# Altium PCB somiqboard.PcbDoc (part 9 of 10)
Units mm, origin at the board's own origin, x right, y up, seen from the top; angles counter-clockwise.
Board outline 110 x 96 mm, 4 copper layers (Top Layer, Ground_Plane, Power_Plane, Bottom Layer), stack 1.454 mm thick; 221 components, 356 nets, 1185 pads, 539 vias.
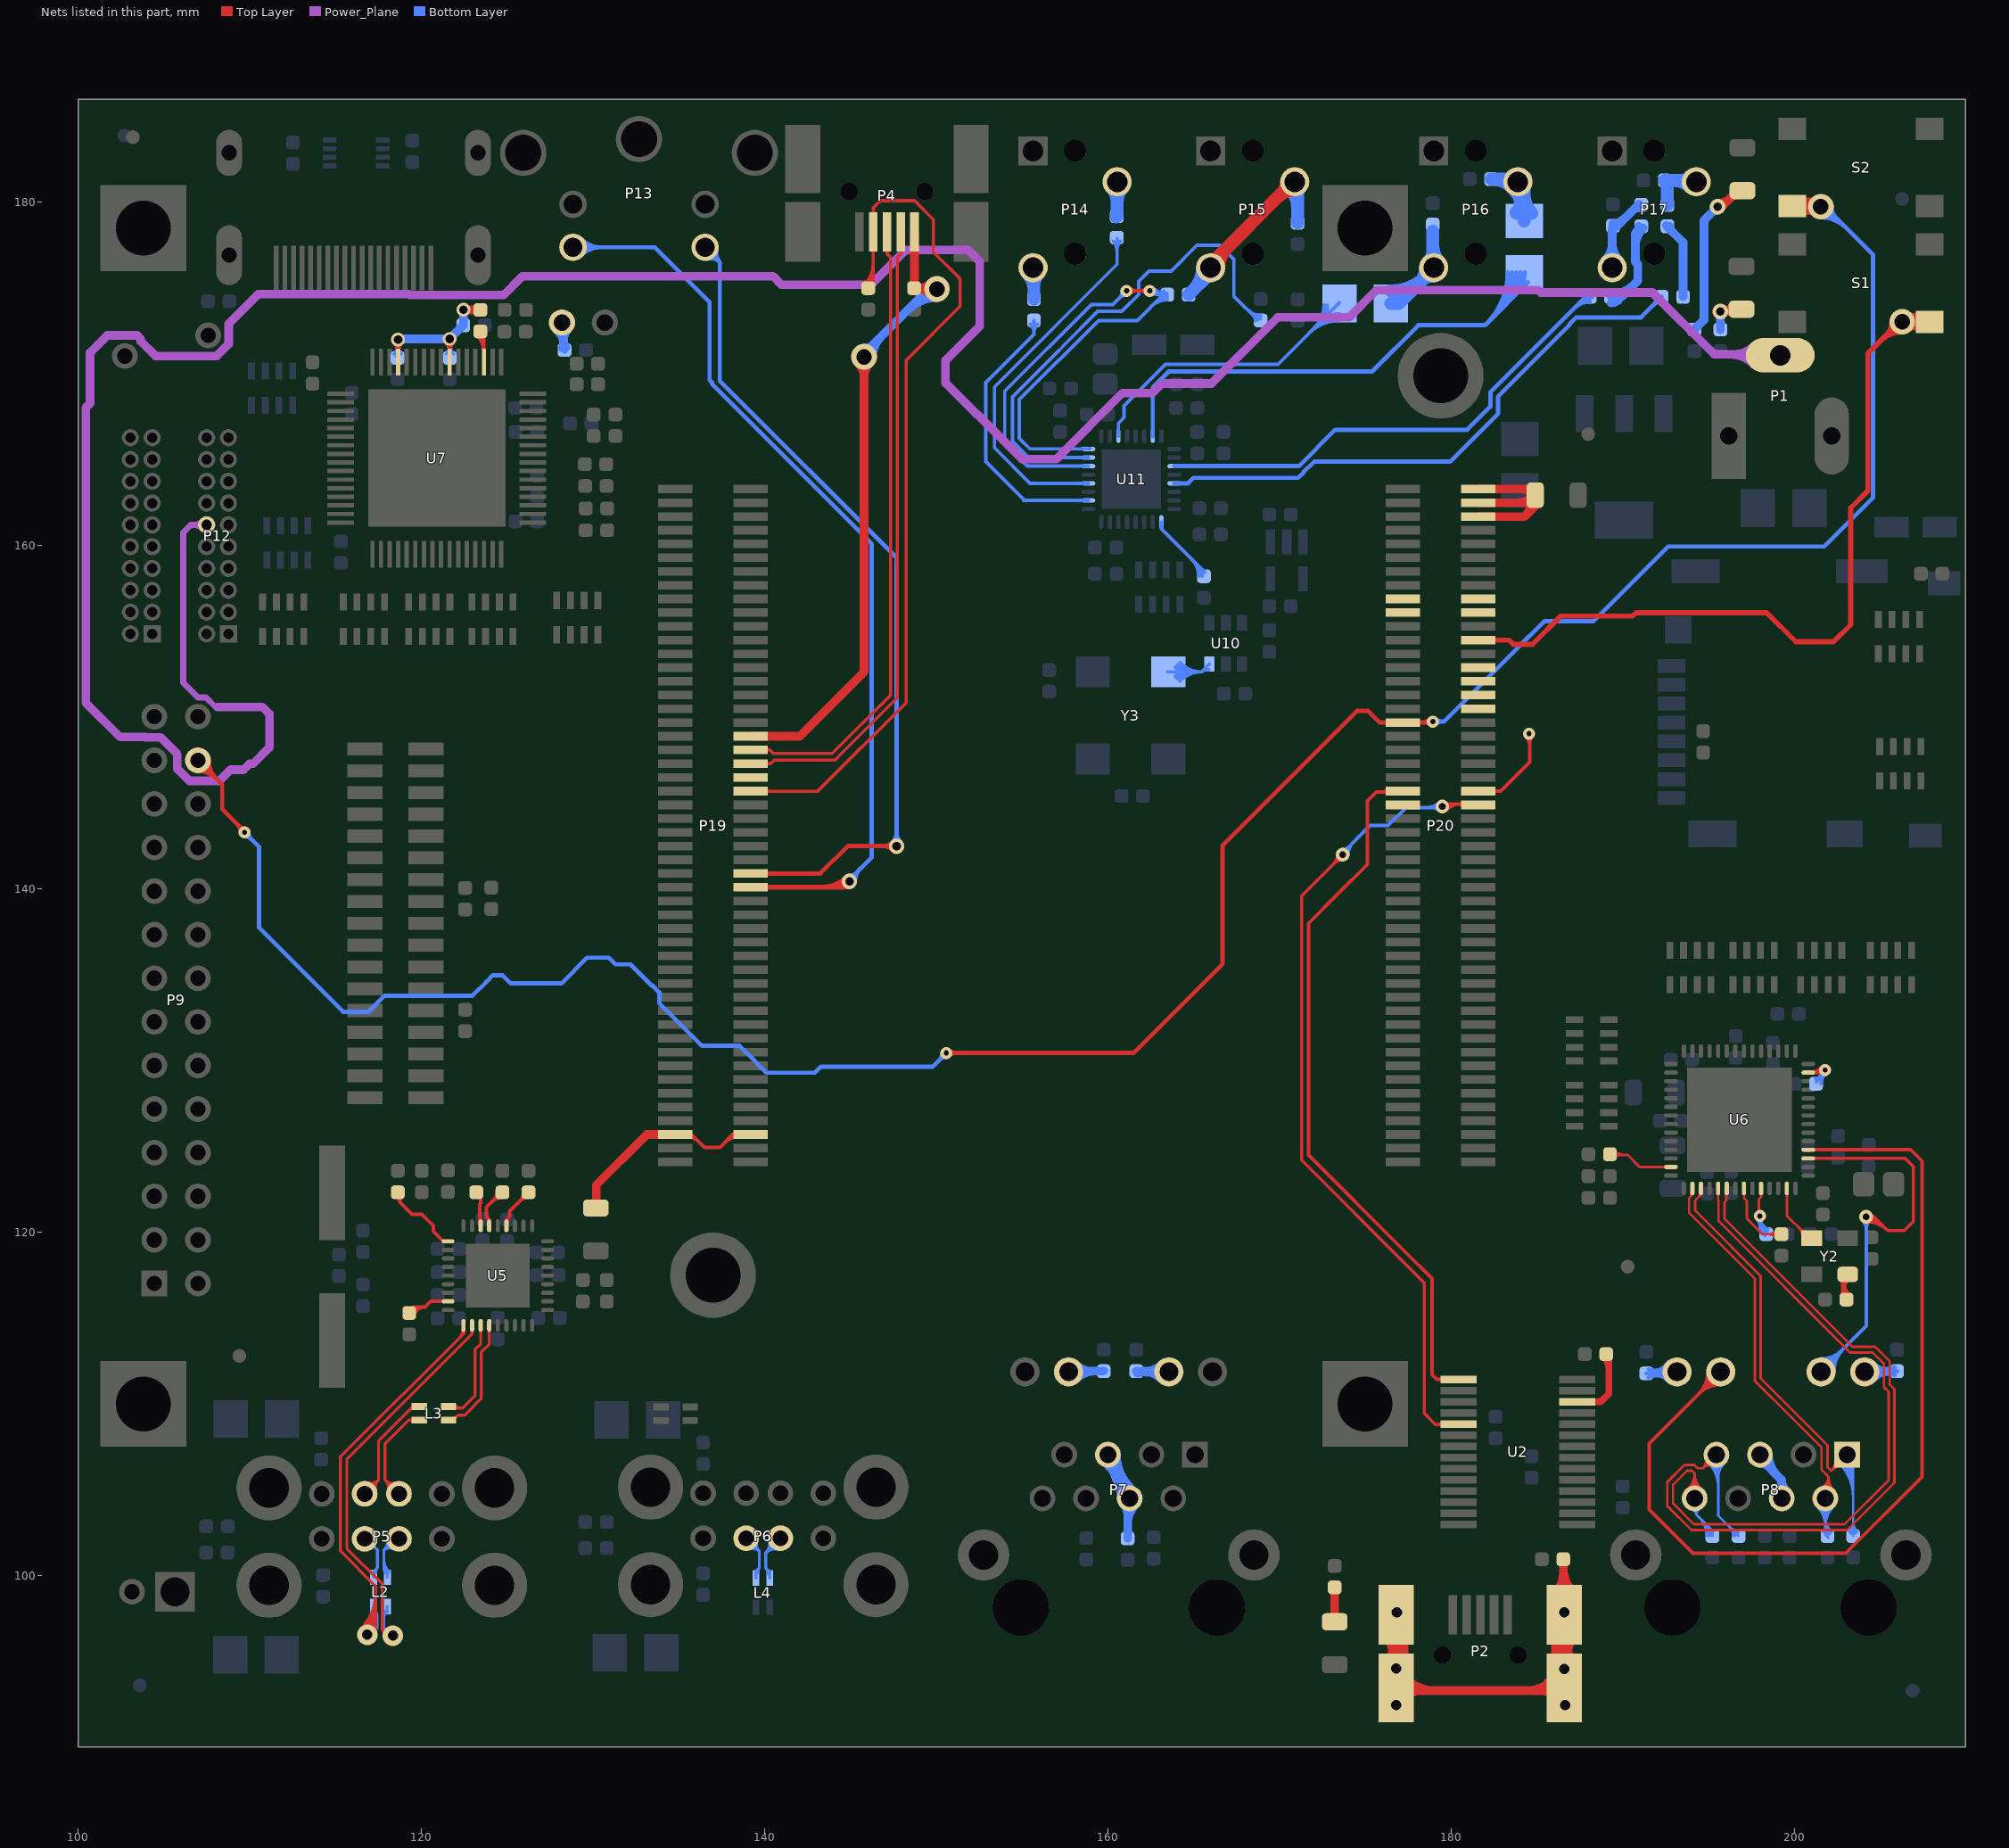
[diagram p11: the nets of this part, all layers, seen from the top]

## Via types
v1: diameter 0.7/0.7/0.7/0.7 (per signal layer), hole 0.3, Top Layer to Bottom Layer, tented both sides, 270 vias
v2: diameter 0.8, hole 0.3, Top Layer to Bottom Layer, tented both sides, 49 vias
v3: diameter 0.6/0.7/0.7/0.6 (per signal layer), hole 0.3, Top Layer to Bottom Layer, tented both sides, 47 vias
v4: diameter 0.6, hole 0.3, Top Layer to Bottom Layer, tented both sides, 43 vias
v5: diameter 1.1/1.1/1.1/1.1 (per signal layer), hole 0.6, Top Layer to Bottom Layer, tented both sides, 32 vias
v6: diameter 0.8/0.8/0.8/0.8 (per signal layer), hole 0.4, Top Layer to Bottom Layer, tented both sides, 31 vias
v7: diameter 0.9/0.9/0.9/0.9 (per signal layer), hole 0.5, Top Layer to Bottom Layer, tented both sides, 29 vias
v8: diameter 1.5/1.5/1.5/1.5 (per signal layer), hole 0.9, Top Layer to Bottom Layer, tented both sides, 14 vias
v9: diameter 1.2/1.2/1.2/1.2 (per signal layer), hole 0.6, Top Layer to Bottom Layer, tented both sides, 10 vias
v10: diameter 0.8/0.8/0.8/0.8 (per signal layer), hole 0.5, Top Layer to Bottom Layer, tented both sides, 6 vias
v11: diameter 1/1/1/1 (per signal layer), hole 0.5, Top Layer to Bottom Layer, tented both sides, 3 vias
v12: diameter 0.8/0.8/0.8/0.8 (per signal layer), hole 0.8, Top Layer to Bottom Layer, tented both sides, 2 vias
v13: diameter 1.2/1.2/1.2/1.2 (per signal layer), hole 1.2, Top Layer to Bottom Layer, tented both sides, 2 vias
v14: diameter 0.6/0.6/0.6/0.6 (per signal layer), hole 0.3, Top Layer to Bottom Layer, tented both sides, 1 vias

## Nets (pads, with @x,y where several pads share a name; then routed paths per layer and width w, separated by ;. In a path a pad name is that pad's centre, name@x,y a point inside that pad or via, vN(x,y) a via of type N, cw(c..) or ccw(c..) an arc to the next point about the centre after c; other vN are vias at no path point) (continued)
NetC64_1: C64.1 P14.3 | length 3.5
  Bottom Layer w0.75: P14.3@155.315,175.864 cw(c154.382,174.931) 155.702,174.931 ; P14.3@155.7,176.1 155.702,176.098 C64.1@155.702,174.371 ; 155.702,175.176 cw(c156.675,175.176) P14.3@155.987,175.864
NetC64_2: C64.2 U11.10 | length 17.5
  Bottom Layer w0.2: 155.1,162.65 155.115,162.635 U11.10@158.877,162.635 ; 155.15,162.65 152.9,164.9 152.9,169.5 155.702,172.302 C64.2@155.702,173.121 ; C64.2@155.49,172.909 cw(c154.978,172.397) 155.702,172.397 cw(c156.426,172.397) C64.2@155.914,172.909
NetC65_1: C65.1 P15.2 P15.3 R44.1 | length 17.5
  Top Layer w0.75: P15.3@165.75,176.15 165.9,176.3 P15.2@170.825,181.225 ; P15.3@166.475,176.2 cw(c168.105,176.2) 166.952,177.352 ; 169.918,180.318 cw(c170.9,179.337) P15.2@170.9,180.725 ; 170.16,180.56 ccw(c169.52,181.2) P15.2@170.425,181.2
  Bottom Layer w0.75: C65.1@164.719,174.625 165.95,175.856 P15.3@165.95,176.25 ; C65.1@164.981,174.887 ccw(c163.669,176.2) P15.3@165.525,176.2 ; P15.2@170.564,180.864 cw(c169.345,179.645) 171.069,179.645 ; R44.1@171.069,178.816 171.069,181.069 P15.2@171.1,181.1
NetC65_2: C65.2 U11.14 U11.16 | length 45.9
  Top Layer w0.2: v1(161.1,174.85) v1(162.45,174.85) ; v1@161.277,174.673 cw(c161.704,174.246) 161.704,174.85 cw(c161.704,175.454) v1@161.277,175.027 ; v1@162.273,174.673 ccw(c161.846,174.246) 161.846,174.85 ccw(c161.846,175.454) v1@162.273,175.027
  Bottom Layer w0.2: U11.14@158.877,164.635 155.315,164.635 154,165.95 154,169 159.05,174.05 160.3,174.05 v1(161.1,174.85) ; U11.16@158.95,165.65 158.94,165.64 155.46,165.64 154.85,166.25 154.85,168.51 157.19,170.85 157.2,170.85 159.471,173.121 161.721,173.121 C65.2@163.25,174.65 ; v1@160.85,174.85 cw(c160.246,174.85) 160.673,174.423 cw(c161.1,173.996) v1@161.1,174.6 ; v1(162.45,174.85) 162.6,174.7 C65.2@163.45,174.7 ; v1@162.485,174.885 ccw(c162.933,175.333) 162.933,174.7 ; v1@162.494,174.874 ccw(c162.891,175.09) 162.774,174.653 ; 162.54,173.94 cw(c163.469,173.012) C65.2@163.469,174.325 ; v1@162.575,174.633 cw(c162.696,174.424) 162.758,174.658 ; v1@162.6,174.7 cw(c162.6,173.806) C65.2@163.251,174.419 ; v1@162.627,175.027 ccw(c163.416,175.816) C65.2@163.416,174.7 ; 162.882,174.282 cw(c163.469,173.695) C65.2@163.469,174.525 ; 162.926,174.7 ccw(c162.926,175.168) C65.2@163.257,174.837 ; 163.063,174.7 cw(c163.063,174.243) C65.2@163.396,174.556
NetC66_1: C66.1 P14.2 | length 3.9
  Bottom Layer w0.75: P14.2@160.215,180.864 cw(c159.404,180.053) 160.551,180.053 cw(c161.698,180.053) P14.2@160.887,180.864 ; C66.1@160.5,179.15 160.551,179.201 P14.2@160.551,181.2
NetC66_2: C66.2 U11.12 | length 22.6
  Bottom Layer w0.2: U11.12@158.877,163.635 155.465,163.635 153.4,165.7 153.4,169.25 160.55,176.4 C66.2@160.55,177.9 ; C66.2@160.316,177.735 cw(c159.751,177.17) 160.55,177.17 ; 160.55,177.276 cw(c161.199,177.276) C66.2@160.74,177.735
NetC69_1: C69.1 U11.19 | length 24.2
  Bottom Layer w0.2: U11.19@160.627,166.385 160.627,167.14 160.95,167.463 160.95,168.151 163.374,170.575 169.925,170.575 C69.1@173.5,174.15 ; 171.732,172.382 cw(c173.506,170.609) C69.1@173.506,173.117 ; 172.068,172.718 ccw(c170.769,174.017) C69.1@172.606,174.017 ; 172.074,172.724 cw(c173.506,171.291) C69.1@173.506,173.317 ; 172.409,173.059 ccw(c171.452,174.017) C69.1@172.806,174.017 ; 172.415,173.065 cw(c173.506,171.974) C69.1@173.506,173.517
NetC69_2: C69.2 P16.3 R53.2 | length 11.7
  Bottom Layer w0.75: C69.2@176.506,174.117 176.967,174.117 179.05,176.2 P16.3@179.35,176.2 ; C69.2@176.506,174.842 ccw(c176.506,177.705) P16.3@178.531,175.681 ; 178.154,175.304 ccw(c177.258,176.2) P16.3@178.525,176.2 ; 178.274,175.424 cw(c179,174.699) P16.3@179,175.725 ; P16.3@178.664,176.536 ccw(c177.974,177.226) 178.95,177.226 ; 178.95,177.467 ccw(c180.267,177.467) P16.3@179.336,176.536 ; R53.2@178.95,178.335 178.95,176.7 P16.3@179.3,176.35
NetC72_1: C72.1 U11.23 | length 39.3
  Bottom Layer w0.25: U11.23@162.627,166.385 162.627,169.227 163.55,170.15 175.4,170.15 178.1,172.85 182,172.85 C72.1@184.5,175.35 ; 182.053,172.903 ccw(c179.036,175.919) C72.1@183.302,175.919 ; 182.479,173.329 ccw(c179.89,175.919) C72.1@183.552,175.919 ; 182.906,173.756 ccw(c180.743,175.919) C72.1@183.802,175.919 ; 183.333,174.183 ccw(c181.597,175.919) C72.1@184.052,175.919 ; 183.76,174.61 ccw(c182.45,175.919) C72.1@184.302,175.919
NetC72_2: C72.2 P16.2 R51.2 | length 11.5
  Bottom Layer w0.75: R51.2@182.352,181.356 184.256,181.356 P16.2@184.35,181.45 ; R51.2@182.377,181.356 cw(c182.377,179.677) 183.564,180.864 cw(c181.843,179.143) C72.2@184.277,179.143 ; C72.2@183.79,179.41 ccw(c183.381,179.93) 184.02,180.101 ; C72.2@183.835,179.361 ccw(c182.768,180.428) 184.277,180.428 ccw(c185.786,180.428) C72.2@184.719,179.361 ; 184.032,180.056 ccw(c184.98,180.31) C72.2@184.489,179.46 ; C72.2@184.277,178.919 184.277,181.177 P16.2@184.3,181.2
NetC73_1: C73.1 R49.2 | length 9.3
  Bottom Layer w0.5: R49.2@189.337,174.148 ccw(c189.337,174.778) 189.783,174.333 ; R49.2@189.337,174.498 189.948,174.498 190.9,175.45 190.9,176.394 190.75,176.544 190.75,178.2 C73.1@191.05,178.5 ; R49.2@189.337,174.648 ccw(c189.337,176.485) 190.636,175.186 ; 190.75,177.419 cw(c192.283,177.419) C73.1@191.199,178.503 ; 190.75,178.075 cw(c191.135,178.075) C73.1@191.105,178.459 ; C73.1@190.79,178.24 ccw(c190.422,178.609) C73.1@190.943,178.609
NetC73_2: C73.2 P17.3 R54.2 | length 8.5
  Bottom Layer w0.5: P17.3@188.976,176.624 ccw(c187.951,177.649) 189.4,177.649 ccw(c190.849,177.649) P17.3@189.824,176.624 ; P17.3@189.4,176.2 189.4,178.45 R54.2@189.5,178.55 ; 189.4,178.165 cw(c189.906,178.165) R54.2@189.548,178.523 ; R54.2@189.442,178.629 189.679,178.629 C73.2@190.95,179.9 ; R54.2@189.442,178.779 ccw(c189.442,179.713) 190.103,179.053 ; 190.523,179.473 cw(c191.093,178.903) C73.2@191.093,179.709
NetC76_1: C76.1 R50.2 | length 4.9
  Bottom Layer w0.5: C76.1@192.55,178.65 193.528,177.672 R50.2@193.528,174.498 ; C76.1@192.767,178.609 ccw(c193.192,178.609) C76.1@192.891,178.309
NetC76_2: C76.2 P17.2 R52.2 | length 5.8
  Bottom Layer w0.75: R52.2@192.45,181.25 192.617,181.083 C76.2@192.617,179.859 ; R52.2@192.452,181.258 cw(c192.055,180.861) 192.617,180.861 ; R52.2@192.47,181.276 194.574,181.276 P17.2@194.55,181.252 ; 192.97,181.276 cw(c192.97,179.87) P17.2@193.964,180.864 ; 193.337,181.276 ccw(c193.337,182.163) P17.2@193.964,181.536
NetD1_1: D1.1 R1.1 | length 11.9
  Top Layer w0.5: v7(195.55,179.75) 195.8,179.75 D1.1@196.75,180.7 ; v7@195.55,179.95 ccw(c195.55,181.036) D1.1@196.318,180.268 ; 196.306,180.256 cw(c196.736,179.825) D1.1@196.736,180.434 ; D1.1@196.311,180.261 ccw(c195.888,180.684) D1.1@196.486,180.684
  Bottom Layer w0.5: R1.1@194.183,172.593 194.75,173.16 194.75,178.95 v7(195.55,179.75) ; v7@195.35,179.75 cw(c194.867,179.75) 195.209,179.409 cw(c195.55,179.067) v7@195.55,179.55
NetD2_1: D2.1 R2.1 | length 5.2
  Top Layer w0.25: D2.1@196.69,173.64 196.7,173.65 D2.1@196.9,173.85
  Top Layer w0.5: v7(195.7,173.65) 196.7,173.65 D2.1@196.75,173.65 ; v7@195.779,173.65 ccw(c195.779,174.682) D2.1@196.509,173.952 ; v7@195.8,173.823 ccw(c196.076,174.302) D2.1@196.22,173.768 ; v7@195.841,173.509 cw(c196.183,173.167) 196.183,173.65 cw(c196.183,174.133) v7@195.841,173.791
  Bottom Layer w0.5: v7@195.559,173.509 cw(c195.2,173.15) 195.707,173.15 ; v7(195.7,173.65) 195.707,173.643 R2.1@195.707,172.593 ; 195.707,173.184 cw(c196.166,173.184) v7@195.841,173.509
NetD3_1: D3.1 R3.1 | length 3
  Top Layer w0.5: D3.1@173.051,97.484 ccw(c172.624,97.911) 173.228,97.911 ccw(c173.832,97.911) D3.1@173.405,97.484 ; R3.1@173.2,99.35 173.228,99.322 R3.1@173.228,99.314 D3.1@173.228,97.307
NetL1_1: L1.1 P2.6 P2.7 | length 107.5
  Top Layer w0.5: P2.7@176.268,94.988 ccw(c173.807,97.449) P2.7@177.287,97.449 ; P2.7@176.268,96.442 cw(c173.807,93.982) P2.7@177.287,93.982 ; P2.7@176.409,96.187 cw(c174.668,95.287) P2.7@176.531,94.678 ; 176.585,95.52 ccw(c177.383,95.043) P2.7@176.66,94.458 ; P2.7@176.588,92.662 ccw(c176.076,93.174) 176.8,93.174 ccw(c177.524,93.174) 177.012,92.662 cw(c177.404,93.054) P2.7@176.85,93.054 ; P2.7@176.596,92.67 ccw(c176.061,93.25) P2.7@176.85,93.25 ; P2.7@176.604,94.372 cw(c176.092,93.86) 176.816,93.86 cw(c177.54,93.86) P2.7@177.028,94.372 ; P2.7@176.604,94.796 ccw(c174.954,96.446) P2.7@177.287,96.446 ; P2.7@176.621,94.635 ccw(c175.014,96.242) P2.7@177.287,96.242 ; P2.7@176.621,96.796 cw(c175.014,95.189) P2.7@177.287,95.189 ; P2.7@176.638,97.638 cw(c175.071,96.071) P2.7@177.287,96.071 ; P2.7@176.662,94.326 cw(c176.01,93.229) P2.7@177.287,93.229 ; P2.7@176.742,97.57 cw(c176.511,96.972) P2.7@177.134,96.82 ; P2.7@176.773,98.14 ccw(c176.595,98.809) P2.7@177.287,98.809 ; v5(176.8,92.45) 176.8,93.2 P2.7@176.85,93.25 ; P2.7@176.816,93.465 v5(176.816,94.584) ; P2.7@176.85,92.35 P2.7@176.85,92.826 ; v5(176.85,97.85) 176.85,98.372 P2.7@177.287,98.809 ; P2.7@176.918,94.756 cw(c176.532,94.107) P2.7@177.287,94.107 ; P2.7@176.922,98.037 cw(c176.718,97.508) P2.7@177.269,97.373 ; P2.7@176.944,94.738 cw(c176.342,94.018) P2.7@177.277,94.101 ; P2.7@176.953,96.135 ccw(c177.977,95.523) P2.7@177.049,94.773 ; P2.7@176.957,94.443 ccw(c176.161,95.239) P2.7@177.287,95.239 ; P2.7@176.957,95.126 cw(c176.261,94.766) P2.7@177.006,94.522 ; P2.7@176.991,97.991 cw(c176.278,97.278) P2.7@177.287,97.278 ; P2.7@177.01,93.66 ccw(c177.879,94.529) 177.879,93.3 ; P2.7@177.09,92.528 cw(c177.825,92.724) P2.7@177.287,93.263 ; P2.7@177.094,94.697 cw(c178.004,95.066) 177.154,95.557 ; P2.7@177.126,97.968 cw(c177.826,98.27) P2.7@177.287,98.809 ; P2.7@177.287,93.309 P2.7@177.287,93.263 ; P2.7@177.364,92.917 cw(c178.287,91.994) 178.287,93.3 ; P2.7@177.364,94.013 ccw(c179.086,95.736) 179.086,93.3 ; 184.345,93.3 ccw(c184.345,95.736) P2.6@186.068,94.013 ; 185.144,93.3 cw(c185.144,91.994) P2.6@186.068,92.917 ; 185.553,93.3 ccw(c185.553,94.529) P2.6@186.421,93.66 ; P2.6@185.657,93.776 ccw(c184.956,94.991) P2.6@186.31,94.628 ; P2.6@185.969,93.956 ccw(c185.637,94.531) P2.6@186.3,94.544 ; P2.6@186.068,98.988 ccw(c184.904,100.153) 186.55,100.153 ; P2.6@186.1,93.204 cw(c187.333,93.204) P2.6@186.743,94.286 ; P2.6@186.1,93.874 cw(c189.732,93.874) P2.6@187.164,96.442 ; P2.6@186.1,94.045 cw(c186.875,94.045) P2.6@186.504,94.726 ; P2.6@186.1,95.081 cw(c188.525,95.081) P2.6@186.81,96.796 ; P2.6@186.1,95.274 ccw(c187.324,95.274) P2.6@186.459,94.409 ; 186.1,95.919 cw(c188.531,95.919) P2.6@186.812,97.638 ; P2.6@186.1,96.35 ccw(c188.525,96.35) P2.6@186.81,94.635 ; P2.6@186.1,96.481 ccw(c188.531,96.481) P2.6@186.812,94.762 ; P2.6@186.1,97.126 cw(c187.324,97.126) P2.6@186.459,97.991 ; P2.6@186.1,97.557 ccw(c189.732,97.557) P2.6@187.164,94.988 ; P2.6@186.1,98.187 ccw(c186.64,98.187) P2.6@186.577,97.651 ; P2.6@186.115,94.029 cw(c187.109,93.935) P2.6@186.473,94.704 ; P2.6@186.148,97.363 cw(c186.695,97.499) P2.6@186.548,98.043 ; P2.6@186.187,93.309 186.178,93.3 186.65,93.3 v5(186.65,92.45) ; P2.6@186.2,98.85 P2.6@186.187,98.837 ; 186.247,95.61 cw(c185.292,95.058) P2.6@186.32,94.659 ; P2.6@186.272,96.867 cw(c186.829,97.006) P2.6@186.679,97.56 ; P2.6@186.328,97.976 ccw(c185.693,98.268) P2.6@186.187,98.763 ; P2.6@186.371,94.744 ccw(c185.496,95.488) P2.6@186.479,96.083 ; P2.6@186.388,94.338 cw(c185.838,93.788) P2.6@186.616,93.788 ; P2.6@186.388,98.062 ccw(c185.996,98.454) P2.6@186.55,98.454 ; P2.6@186.411,94.483 cw(c187.167,94.751) P2.6@186.455,95.119 ; P2.6@186.438,92.662 ccw(c185.926,93.174) 186.65,93.174 ccw(c187.374,93.174) P2.6@186.862,92.662 ; P2.6@186.55,98.695 ccw(c187.445,98.695) P2.6@186.812,98.062 ; 186.55,100.47 ccw(c188.646,100.47) P2.6@187.164,98.988 ; L1.1@186.55,100.95 P2.6@186.55,98.4 ; v5(186.6,94.55) 186.6,94.6 186.616,94.616 P2.6@186.616,93.465 ; v5(186.6,97.85) P2.6@186.6,97.9 ; P2.6@186.616,93.864 cw(c187.286,93.864) P2.6@186.812,94.338 ; P2.6@186.635,98.148 cw(c186.706,98.75) P2.6@186.1,98.75 ; P2.6@186.752,94.421 ccw(c186.054,95.014) 186.838,95.488 ; P2.6@186.883,94.65 cw(c188.657,95.279) P2.6@186.985,96.144 ; P2.7@176.85,92.826 P2.7@176.85,93.25 ; P2.7@176.85,92.826 P2.7@177.287,93.263 ; P2.7@177.287,98.809 177.287,93.313 177.3,93.3 186.1,93.3 P2.6@186.1,98.75 ; P2.6@186.1,98.75 P2.6@186.187,98.837 ; P2.6@186.187,98.763 P2.6@186.187,98.837 ; P2.6@186.187,98.763 P2.6@186.55,98.4 ; P2.6@186.55,98.4 ccw(c186.857,98.4) 186.727,98.122 cw(c186.857,98.4) P2.6@186.55,98.4 ; P2.6@186.55,98.4 cw(c186.12,98.4) 186.403,98.076 ccw(c186.12,98.4) P2.6@186.55,98.4 ; P2.6@186.55,98.4 186.55,97.95 P2.6@186.6,97.9 ; P2.6@186.55,98.4 186.6,98.35 P2.6@186.6,97.9
NetP7_4: P7.4 P7.5 R19.2 | length 15.3
  Bottom Layer w0.5: P7.5@160,107 P7.5@160,106.45 ; P7.5@160.01,107.04 ccw(c161.446,107.035) 160.431,106.019 ; P7.5@160.479,106.866 ccw(c162.093,106.268) 160.602,105.407 ; P7.5@160.51,107.038 ccw(c163.139,107.029) P7.4@161.28,105.17 ; P7.4@160.78,104.51 ccw(c158.116,104.565) P7.5@160,106.45 ; 160.829,105.621 cw(c159.74,104.532) P7.4@161.28,104.5 P7.4@161.28,105.17 ; P7.4@160.926,104.146 cw(c160.355,103.575) 161.163,103.575 ; R19.2@161.163,102.164 P7.4@161.163,104.463 ; 161.163,103.01 cw(c162.77,103.01) P7.4@161.634,104.146 ; P7.5@160,106.45 P7.4@161.28,105.17
NetP7_10: P7.10 R17.2 | length 4.6
  Bottom Layer w0.5: R17.2@161.671,111.907 163.407,111.907 P7.10@163.45,111.95 ; R17.2@161.746,111.777 cw(c162.087,111.187) 162.263,111.845 ; R17.2@162.032,111.907 cw(c162.032,110.332) P7.10@163.146,111.446 ; 162.211,111.907 ccw(c162.211,113.229) P7.10@163.146,112.294
NetP7_11: P7.11 R18.2 | length 4.6
  Bottom Layer w0.5: P7.11@157.5,111.85 157.557,111.907 R18.2@159.766,111.907 ; P7.11@158.144,111.446 cw(c159.258,110.332) 159.258,111.907 ; P7.11@158.144,112.294 ccw(c159.079,113.229) 159.079,111.907
NetP8_4: P8.4 P8.5 | length 6.2
  Bottom Layer w0.5: P8.5@198.01,106.54 cw(c198.01,105.816) 198.522,106.328 ; P8.5@198.1,106.75 199.28,105.57 ; P8.5@198.51,107.04 ccw(c200.2,107.04) 199.005,105.845 ; P8.4@198.959,104.884 ccw(c198.385,105.57) 199.28,105.57 ; P8.4@199.28,104.5 199.28,105.57 ; P8.4@199.601,104.884 cw(c200.175,105.57) 199.28,105.57
NetP8_9: P8.9 R29.2 | length 9.4
  Bottom Layer w0.25: P8.9@204.3,111.95 204.343,111.907 R29.2@205.994,111.907 ; P8.9@204.446,111.534 cw(c205.346,110.634) 205.346,111.907 ; P8.9@204.446,112.206 ccw(c205.167,112.927) 205.167,111.907 ; P8.9@204.623,111.357 cw(c205.95,110.03) R29.2@205.95,111.907 ; P8.9@204.623,112.383 ccw(c205.771,113.531) R29.2@205.771,111.907 ; 205.203,112.059 ccw(c205.426,112.891) R29.2@205.857,112.145 ; 205.323,111.739 cw(c205.505,111.06) R29.2@205.856,111.669 ; 205.377,111.753 ccw(c205.215,112.357) R29.2@205.756,112.045 ; 205.472,111.987 cw(c205.352,111.536) R29.2@205.756,111.77 ; R29.2@205.8,111.713 ccw(c205.33,111.243) 205.33,111.907 ccw(c205.33,112.571) R29.2@205.8,112.101
NetP8_12: P8.12 R30.2 | length 9.1
  Bottom Layer w0.25: R30.2@191.527,111.542 cw(c191.972,110.769) 192.203,111.631 ; R30.2@191.526,112.018 ccw(c191.858,112.593) 192.03,111.952 ccw(c192.202,111.311) R30.2@191.627,111.643 ; R30.2@191.583,111.586 cw(c192.053,111.116) 192.053,111.78 cw(c192.053,112.444) R30.2@191.583,111.974 ; R30.2@191.627,111.918 ccw(c192.005,112.135) 191.892,111.714 ; R30.2@191.647,111.78 cw(c191.647,110.337) P8.12@192.667,111.357 ; 191.938,111.78 ccw(c191.938,112.952) P8.12@192.822,112.182 ; 192.251,111.78 cw(c192.251,110.941) P8.12@192.844,111.534 ; P8.12@192.633,112.346 cw(c191.389,113.43) R30.2@191.389,111.78 193.13,111.78 P8.12@193.11,111.8
NetP19_95: P19.95 P19.96 R56.1 | length 15.5
  Top Layer w0.21: P19.96@134.75,125.7 P19.96@134.8,125.7 135.75,125.7 136.5,124.95 137.4,124.95 138.15,125.7 ; P19.96@135.55,125.555 cw(c135.55,124.722) 136.139,125.311 ; 137.69,125.24 cw(c138.45,124.481) P19.95@138.45,125.555 ; 138.049,125.599 cw(c138.45,125.198) P19.95@138.45,125.765 ; P19.95@138.336,125.61 ccw(c138.15,125.462) 138.15,125.7 ; P19.95@138.336,125.79 cw(c138.15,125.938) 138.15,125.7 ; P19.95@139.2,125.7 138.15,125.7
  Top Layer w0.5: R56.1@129.998,121.589 ccw(c129.511,122.076) 130.2,122.076 ; R56.1@130.2,121.45 130.2,122.75 133.15,125.7 P19.96@134.75,125.7 ; 130.2,121.955 ccw(c130.718,121.955) R56.1@130.352,121.589
NetP20_1: P20.1 P20.3 P20.5 R57.1 | length 13.5
  Top Layer w0.5: P20.5@181.6,161.7 184.3,161.7 ; P20.3@181.6,162.5 184.6,162.5 R57.1@184.85,162.75 ; P20.1@181.6,163.3 184.6,163.3 R57.1@184.8,163.1 ; 183.847,162.5 ccw(c183.847,163.756) R57.1@184.735,162.868 ; 184.045,163.3 cw(c184.045,162.324) R57.1@184.735,163.014 ; R57.1@184.663,162.673 cw(c183.417,162.583) 184.3,161.7 ; R57.1@184.9,162.8 184.9,162.3 184.3,161.7
NetR4_2: R4.2 U2.26 | length 5.1
  Top Layer w0.4: U2.26@187.35,110.125 188.725,110.125 189.2,110.6 R4.2@189.2,112.9 ; R4.2@188.909,112.759 cw(c188.205,112.055) 189.2,112.055
NetR6_1: R6.1 U5.28 | length 5.2
  Top Layer w0.2: R6.1@118.533,122.046 cw(c118.423,121.738) 118.75,121.738 ; R6.1@118.6,122.3 118.75,122.15 118.75,121.75 119.45,121.05 120.031,121.05 120.7,120.381 120.7,120.05 121.275,119.475 U5.28@121.56,119.475 ; 118.75,121.887 cw(c119.075,121.887) R6.1@118.845,122.117
NetR8_1: R8.1 U5.22 | length 3.8
  Top Layer w0.2: U5.22@124.95,120.4 124.95,120.716 125.15,120.916 125.15,121.226 R8.1@126.253,122.329 ; U5.22@124.985,120.625 cw(c125.289,120.625) 125.074,120.84 ; R8.1@125.953,122.329 cw(c125.229,122.329) 125.741,121.817 cw(c126.253,121.305) R8.1@126.253,122.029
NetR9_1: R9.1 U5.24 | length 3.7
  Top Layer w0.2: 123.846,120.84 cw(c123.631,120.625) U5.24@123.935,120.625 ; U5.24@123.96,120.375 123.96,120.726 123.8,120.886 123.8,121.469 124.631,122.3 R9.1@124.65,122.3 ; 124.099,121.768 cw(c124.729,121.138) R9.1@124.729,122.029 ; 124.266,121.935 ccw(c123.872,122.329) R9.1@124.429,122.329
NetR10_1: R10.1 U5.25 | length 2.5
  Top Layer w0.2: R10.1@123.15,122.45 123.46,122.14 123.46,121.695 123.4,121.635 123.4,120.435 U5.25@123.46,120.375 ; 123.4,120.831 ccw(c123.666,120.831) U5.25@123.478,120.643
NetR11_1: R11.1 U5.35 | length 4.7
  Top Layer w0.2: R11.1@119.206,115.333 cw(c119.654,115.175) 119.654,115.65 ; R11.1@119.25,115.3 119.6,115.65 120.219,115.65 ; R11.1@119.394,115.267 cw(c119.936,115.075) 119.936,115.65 ; R11.1@119.583,115.2 cw(c120.219,114.975) 120.219,115.65 ; U5.35@121.56,115.975 120.544,115.975 120.219,115.65
NetR14_1: R14.1 U6.52 | length 8.7
  Top Layer w0.15: v1(198,120.95) 197.949,121 197.949,121.935 198.074,122.06 U6.52@198.074,122.555
  Bottom Layer w0.15: v1@197.808,120.752 cw(c197.371,120.3) 198,120.3 ; v1@197.87,120.707 cw(c197.68,120.349) 198.071,120.454 cw(c198.324,120.522) v1@198.166,120.731 ; v1@197.953,120.679 cw(c197.919,120.483) 198.111,120.534 cw(c198.303,120.586) v1@198.176,120.738 ; 198,120.267 ccw(c198.537,120.267) R14.1@198.325,119.773 ; 198,120.494 ccw(c198.635,120.494) R14.1@198.384,119.911 ; v1@198,120.722 ccw(c198.732,120.722) R14.1@198.443,120.049 ; R14.1@198.068,119.997 ccw(c197.794,120.095) 198,120.3 ; v1@198.191,120.752 ccw(c198.629,120.3) 198,120.3 ; R14.1@198.3,120 198,120.3 ; R14.1@198.31,120.207 cw(c198.242,120.543) 198,120.3 ; R14.1@198.502,120.187 cw(c198.83,120.95) v1(198,120.95) 198,120.3
NetR16_2: R16.2 U6.13 | length 6.4
  Top Layer w0.2: U6.13@200.824,129.305 v1@201.655,129.305 ; U6.13@200.846,129.305 ccw(c200.846,130.404) v1@201.623,129.627 ; 201.329,129.305 ccw(c201.329,129.921) v1@201.765,129.485
  Bottom Layer w0.2: R16.2@201.275,128.951 ccw(c201.275,129.497) 201.661,129.111 ; v1@201.551,129.43 cw(c200.688,129.362) 201.3,128.75 v1@201.8,129.25 ; 201.561,129.053 ccw(c201.367,129.389) v1@201.75,129.443 ; R16.2@201.575,128.666 cw(c202.346,128.704) v1@201.8,129.25 ; v1@201.604,129.295 cw(c201.365,129.106) R16.2@201.629,128.954 ; 201.607,129.057 ccw(c201.256,129.407) v1@201.75,129.446 ; 201.706,129.086 cw(c201.933,128.955) v1@201.865,129.209 ; v1(201.8,129.45) v1@201.8,129.25
NetR20_1: R20.1 U6.50 | length 6.1
  Top Layer w0.15: U6.50@197.074,122.555 197.074,122.01 197.25,121.834 197.25,120.8 198.162,119.888 199.212,119.888 R20.1@199.25,119.85 ; R20.1@199.033,119.658 ccw(c198.478,119.103) 198.478,119.888 ccw(c198.478,120.673) R20.1@199.033,120.118 ; R20.1@199.139,119.764 ccw(c198.841,119.466) 198.841,119.888 ccw(c198.841,120.31) R20.1@199.139,120.012
NetR22_1: R22.1 U6.41 | length 5.6
  Top Layer w0.15: R22.1@189.2,124.5 190.3,124.5 190.995,123.805 U6.41@192.824,123.805 ; R22.1@189.391,124.67 ccw(c189.801,125.08) 189.801,124.5 ; R22.1@189.497,124.316 cw(c189.941,123.872) 189.941,124.5 ; R22.1@189.497,124.776 ccw(c190.163,125.442) 190.163,124.5
NetR28_2: R28.2 Y2.1 | length 6.2
  Top Layer w0.2: Y2.1@202.728,117.303 cw(c202.507,117.082) 202.819,117.082 ; R28.2@202.819,116.328 cw(c204.197,116.328) Y2.1@203.222,117.303 ; 202.819,116.811 cw(c203.714,116.811) Y2.1@203.081,117.444 ; 202.819,116.884 ccw(c203.859,116.884) R28.2@203.124,116.149 ; Y2.1@202.819,117.367 ccw(c204.342,117.367) R28.2@203.265,116.29 ; Y2.1@202.819,117.475 202.819,116.331 R28.2@203,116.15 ; 202.934,116.937 cw(c203.159,116.997) Y2.1@203.086,117.218
  Top Layer w0.25: Y2.1@202.672,117.475 202.672,117.722 Y2.1@202.75,117.8
NetR46_2: R46.2 U11.15 | length 30.5
  Bottom Layer w0.2: U11.15@158.877,165.135 155.399,165.135 154.45,166.084 154.45,168.676 157.024,171.25 157.034,171.25 157.4,171.616 157.4,171.626 159.424,173.65 160.819,173.65 161.8,174.631 161.8,175.4 162.4,176 163.7,176 165.2,177.5 166.55,177.5 167.35,176.7 167.35,174.55 R46.2@168.75,173.15 ; 168.174,173.726 ccw(c168.91,174.462) R46.2@168.91,173.421 ; 168.491,173.409 cw(c168.202,173.121) R46.2@168.61,173.121 ; 168.516,173.384 ccw(c168.91,173.779) R46.2@168.91,173.221
NetR47_2: R47.2 U11.1 | length 6.1
  Bottom Layer w0.2: U11.1@163.127,161.385 163.127,160.973 R47.2@165.65,158.45 ; U11.1@163.152,161.11 ccw(c163.543,161.11) 163.266,160.834 ; 164.905,159.195 cw(c163.932,158.222) R47.2@165.308,158.222 ; 165.246,158.854 cw(c164.615,158.222) R47.2@165.508,158.222
NetR49_1: R49.1 U11.27 | length 30.4
  Bottom Layer w0.25: U11.27@163.877,164.635 163.89,164.649 165.644,164.649 165.645,164.65 166.206,164.65 166.207,164.649 167.041,164.649 167.042,164.65 167.557,164.65 167.572,164.635 171.135,164.635 173.25,166.75 180.95,166.75 182.3,168.1 182.3,168.95 187.8,174.45 R49.1@188.2,174.45 ; 187.21,173.86 cw(c188.087,172.982) R49.1@188.087,174.223 ; 187.636,174.286 cw(c188.087,173.836) R49.1@188.087,174.473
NetR50_1: R50.1 U11.29 | length 34.6
  Bottom Layer w0.25: U11.29@163.877,163.635 164.685,163.635 165,163.95 171.1,163.95 171.4,164.25 ; 171.418,164.282 172.036,164.9 179.95,164.9 182.75,167.7 182.75,168.7 186.938,172.888 186.938,172.938 187.3,173.3 191.08,173.3 R50.1@192.25,174.47 ; R50.1@192.003,174.498 cw(c191.339,174.498) 191.809,174.029 cw(c192.278,173.559) R50.1@192.278,174.223 ; R50.1@192.25,174.5 R50.1@192.25,174.47 ; R50.1@192.278,174.498 R50.1@192.25,174.47
NetR58_2: R58.2 SW1.1 | length 5.2
  Bottom Layer w0.4: SW1.1@127.822,172.584 cw(c126.743,171.393) R58.2@128.35,171.393 ; R58.2@128.177,171.5 ccw(c127.764,171.738) 128.224,171.862 ; SW1.1@128.2,173 128.35,172.85 R58.2@128.35,171.4 ; R58.2@128.209,171.541 ccw(c127.867,171.883) 128.35,171.883 ccw(c128.833,171.883) R58.2@128.491,171.541 ; 128.222,171.87 ccw(c128.694,171.997) R58.2@128.45,171.573 ; 128.35,172.005 cw(c129.195,172.005) SW1.1@128.597,172.603
NetU6_55: U6.55 Y2.3 | length 5.8
  Top Layer w0.15: U6.55@199.574,122.555 199.574,120.976 200.55,120 200.6,120 Y2.3@200.95,119.65 ; 200.217,120.333 cw(c199.534,119.65) Y2.3@200.5,119.65 ; 200.278,120.272 ccw(c200.875,120.87) Y2.3@200.875,120.025 ; Y2.3@200.473,120.077 cw(c200.046,119.65) Y2.3@200.65,119.65 ; Y2.3@200.534,120.016 ccw(c200.875,120.358) Y2.3@200.875,119.875
NetU10_3: U10.3 Y3.3 | length 9.4
  Bottom Layer w0.2: Y3.3@163.5,152.65 165.473,152.65 ; Y3.3@163.922,152.38 cw(c164.547,151.792) 164.547,152.65 ; Y3.3@163.924,152.926 ccw(c164.557,153.512) 164.557,152.65 ; Y3.3@164.068,152.243 cw(c165.01,151.356) 165.01,152.65 ; Y3.3@164.071,153.062 ccw(c165.015,153.937) 165.015,152.65 ; Y3.3@164.214,152.106 cw(c165.473,150.921) 165.473,152.65 ; Y3.3@164.218,153.198 ccw(c165.473,154.362) 165.473,152.65 ; U10.3@165.879,152.761 ccw(c165.773,152.35) 165.473,152.65 ; U10.3@165.928,153.105 165.473,152.65
NLINK_ACT: P8.11 U6.4 | length 58.5
  Top Layer w0.2: P8.11@194.97,111.87 cw(c193.159,111.87) 194.44,110.59 cw(c195.72,109.309) P8.11@195.72,111.12 ; P8.11@195.17,111.87 cw(c193.842,111.87) 194.781,110.931 cw(c195.72,109.992) P8.11@195.72,111.32 ; P8.11@195.5,111.65 191.55,107.7 191.55,103.85 194.1,101.3 203,101.3 207.45,105.75 207.45,124.15 206.795,124.805 U6.4@200.824,124.805
NRESET: P9.26 P20.36 S2.3 | length 164.5
  Top Layer w0.25: P9.26@106.985,146.873 cw(c106.985,145.364) 108.052,146.431 cw(c109.119,147.498) P9.26@107.61,147.498 ; P9.26@106.985,147.123 cw(c106.985,146.218) 107.625,146.858 cw(c108.265,147.498) P9.26@107.36,147.498 ; P9.26@106.985,147.498 108.4,146.083 108.4,144.65 v1@109.7,143.35 ; P9.26@107.05,147.345 P9.26@107.05,147.35 ; 109.281,143.769 cw(c108.811,143.3) v1@109.475,143.3 ; 109.401,143.649 ccw(c109.7,143.947) v1@109.7,143.525 ; v1@109.675,143.325 v1(109.7,143.3) ; v1(150.6,130.45) 161.518,130.45 166.7,135.632 166.7,135.65 ; v1@150.759,130.291 cw(c151.143,129.907) 151.143,130.45 cw(c151.143,130.993) v1@150.759,130.609 ; 166.695,135.651 166.695,142.541 174.529,150.375 175.171,150.375 175.846,149.7 P20.36@177.2,149.7 178.9,149.7 v1(178.95,149.75) ; P20.36@176.362,149.612 ccw(c176.148,149.398) 176.148,149.7 ccw(c176.148,150.002) P20.36@176.362,149.788 ; P20.36@178.038,149.612 cw(c178.252,149.398) 178.252,149.7 cw(c178.252,150.002) P20.36@178.038,149.788 ; 178.286,149.7 ccw(c178.286,150.414) v1@178.791,149.909 ; 178.528,149.7 cw(c178.528,149.328) v1@178.791,149.591
  Top Layer w1: S2.3@199.898,179.777 201.523,179.777 v8(201.55,179.75) ; v8@201.55,179.75 201.75,179.75 v8(201.55,179.75)
  Bottom Layer w0.25: v1@109.7,143.075 cw(c109.7,142.532) 110.084,142.916 cw(c110.468,143.3) v1@109.925,143.3 ; v1(109.7,143.3) 110.55,142.45 110.55,137.75 115.463,132.837 116.913,132.837 117.855,133.78 122.98,133.78 123.775,134.575 123.775,134.58 124.17,134.975 124.73,134.975 125.205,134.5 128.168,134.5 129.662,135.995 130.919,135.995 131.309,135.605 132.189,135.605 133.419,134.375 133.48,134.375 133.875,133.98 133.875,133.339 136.354,130.86 138.548,130.86 138.895,130.513 138.895,130.511 140.111,129.295 142.939,129.295 143.294,129.65 145.318,129.65 145.323,129.645 149.795,129.645 v1(150.6,130.45) ; v1@150.375,130.45 cw(c149.832,130.45) 150.216,130.066 cw(c150.6,129.682) v1@150.6,130.225 ; v1(178.95,149.75) 179.6,149.75 184.121,154.271 184.121,154.275 185.175,155.329 185.179,155.329 185.45,155.6 188.3,155.6 192.65,159.95 201.75,159.95 204.6,162.8 204.6,176.95 v8@201.65,179.9 ; v1@179.109,149.591 cw(c179.493,149.207) 179.493,149.75 cw(c179.493,150.293) v1@179.109,149.909 ; v8@201.55,179.125 cw(c201.55,177.013) 203.044,178.506 ; v8@201.55,179.375 cw(c201.55,177.866) 202.617,178.933 ; v8@202.175,179.75 ccw(c203.08,179.75) 202.44,179.11
NSPD100: P8.10 U6.3 | length 33.3
  Top Layer w0.2: U6.3@200.824,124.305 206.47,124.305 206.95,123.825 206.95,120.625 206.425,120.1 205.45,120.1 ; v6@204.198,121 cw(c204.215,120.191) 204.787,120.763 ; v6@204.2,120.8 v6(204.2,120.9) 204.65,120.9 ; v6@204.202,120.8 cw(c204.228,119.542) 205.118,120.432 ; v6@204.206,120.6 cw(c204.242,118.892) 205.45,120.1 ; v6@204.477,120.785 cw(c204.65,120.713) 204.65,120.9 ; v6@204.477,121.015 ccw(c204.65,121.087) 204.65,120.9 ; 204.65,120.9 205.45,120.1
  Bottom Layer w0.2: P8.10@201.55,111.9 204.2,114.55 v6(204.2,120.9) ; P8.10@201.57,112.42 ccw(c201.57,113.627) 202.424,112.774 ; P8.10@201.57,112.62 ccw(c201.57,114.31) 202.765,113.115 ; P8.10@201.92,111.87 cw(c202.886,111.87) 202.203,112.553 ; P8.10@202.12,111.87 cw(c203.569,111.87) 202.544,112.894 ; P8.10@202.32,111.87 cw(c204.251,111.87) 202.886,113.236 ; v6@203.988,120.688 cw(c203.476,120.176) 204.2,120.176 cw(c204.924,120.176) v6@204.412,120.688
NUSB_PWR: P1.3 P12.12 | length 177.2
  Power_Plane w0.35: P12.12@107.263,160.984 ccw(c106.708,160.429) 106.708,161.214 ccw(c106.708,161.999) P12.12@107.263,161.444 ; P12.12@107.493,161.214 106.564,161.214 106.125,160.775 106.125,152.025 106.987,151.163 107.451,151.163 108.014,150.6 108.12,150.6
  Power_Plane w0.5: 108.12,150.6 110.748,150.6 111.15,150.198 111.15,148.25 110.2,147.3 110,147.3 109.65,146.95 108.881,146.95 108.229,146.298 106.488,146.298 105.785,147.001 105.785,147.855 104.802,148.838 103.948,148.838 103.936,148.85 102.452,148.85 100.45,150.853 100.45,168.04 100.7,168.29 100.7,171.25 101.703,172.253 103.447,172.253 103.65,172.05 103.65,171.919 104.515,171.053 108.08,171.053 108.783,171.756 108.783,172.933 110.5,174.65 119.287,174.65 119.331,174.606 124.806,174.606 125.9,175.7 140.499,175.7 140.999,175.2 146.199,175.2 148.224,177.225 151.875,177.225 152.55,176.55 152.55,172.8 150.55,170.8 150.55,170.223 150.55,169.477 152.377,167.65 152.4,167.65 155,165.05 157,165.05 157,165.042 160.858,168.9 162.15,168.9 162.608,168.9 163.158,169.45 166.05,169.45 169.9,173.3 174.067,173.3 175.667,174.9 182.029,174.9 183.246,174.9 185.09,174.9 185.24,174.75 191.747,174.75 195.347,171.15 P1.3@199.05,171.15 ; 196.247,171.15 cw(c196.247,169.153) P1.3@197.659,170.565 ; 196.511,171.15 ccw(c196.511,172.774) P1.3@197.659,171.626
SYS_BOOT5: P20.23 S1.4 | length 47.6
  Top Layer w0.3: P20.23@181.6,154.5 183.394,154.5 183.644,154.25 184.75,154.25 186.4,155.9 190.6,155.9 190.8,156.1 198.4,156.1 200.1,154.4 202.3,154.4 203.3,155.4 203.3,162.2 204.3,163.2 204.3,171.2 206.146,173.046 206.304,173.046 206.4,173.046 v8@206.4,173.142 ; 205.02,171.92 cw(c206.3,170.639) v8@206.3,172.45 ; 205.382,172.282 ccw(c204.614,173.05) v8@205.7,173.05 ; 205.532,172.432 cw(c206.3,171.664) v8@206.3,172.75
  Top Layer w1: v8@206.304,173.046 v8@206.4,173.142 ; v8@206.4,173.046 S1.4@207.898,173.046
  other v8: 206.3,173.05
TFADJ: R39.2 U7.19 | length 4.5
  Top Layer w0.173: R39.2@123.222,172.264 cw(c122.18,171.222) U7.19@123.654,171.222 ; R39.2@123.345,172.387 cw(c122.598,171.64) 123.654,171.64 ; R39.2@123.467,172.509 cw(c123.015,172.057) 123.654,172.057 ; 123.577,171.508 ccw(c123.776,171.562) U7.19@123.673,171.383 ; U7.19@123.654,170.7 123.654,172.504 R39.2@123.7,172.55
TPI_N: P8.8 R26.2 U6.47 | length 52
  Top Layer w0.144: P8.8@193.765,105.02 ccw(c192.989,105.95) 194.2,105.95 ; P8.8@193.858,104.91 ccw(c193.246,105.642) 194.2,105.642 ccw(c195.154,105.642) P8.8@194.542,104.91 ; P8.8@193.95,104.799 ccw(c193.503,105.334) 194.2,105.334 ccw(c194.897,105.334) P8.8@194.45,104.799 ; P8.8@194.2,104.5 194.2,105.95 ; P8.8@194.635,105.02 cw(c195.411,105.95) 194.2,105.95 ; U6.47@195.537,122.243 cw(c195.446,122.152) 195.574,122.152 cw(c195.702,122.152) U6.47@195.611,122.243 ; U6.47@195.574,122.555 195.574,121.874 195.6,121.848 195.6,120.65 203.258,112.992 204.575,112.992 205.232,112.335 205.232,110.982 205.5,110.714 205.5,105.55 202.944,102.994 194.156,102.994 192.95,104.2 192.95,105.3 193.756,106.106 194.044,106.106 194.2,105.95
  Bottom Layer w0.144: P8.8@194.063,103.836 cw(c194.003,103.545) 194.3,103.545 cw(c194.7,103.545) P8.8@194.515,103.899 ; P8.8@194.092,103.977 cw(c194.039,103.722) 194.3,103.722 ; P8.8@194.3,104.5 194.3,103.55 195.239,102.611 R26.2@195.239,102.304 ; 194.462,103.388 cw(c193.378,102.304) R26.2@194.911,102.304 ; 194.708,103.142 cw(c193.87,102.304) R26.2@195.055,102.304 ; 194.954,102.896 cw(c194.362,102.304) R26.2@195.199,102.304
TPI_P: P8.7 R24.2 U6.48 | length 58
  Top Layer w0.144: P8.7@194.823,106.836 cw(c194.269,106.661) 194.68,106.25 ; P8.7@194.961,106.879 cw(c194.524,106.742) 194.848,106.418 cw(c195.172,106.094) P8.7@195.309,106.531 ; P8.7@195.266,106.393 ccw(c195.091,105.839) 194.68,106.25 ; P8.7@195.47,107.04 194.68,106.25 ; 196.05,122.094 cw(c196.26,122.094) U6.48@196.111,122.243 ; U6.48@196.074,122.555 196.05,122.531 196.05,121.864 195.944,121.758 195.944,120.792 203.4,113.336 204.717,113.336 205.576,112.477 205.576,111.124 205.844,110.856 205.844,105.408 203.086,102.65 194.014,102.65 192.606,104.058 192.606,105.442 193.614,106.45 194.186,106.45 194.386,106.25 194.68,106.25
  Bottom Layer w0.144: P8.7@194.991,106.561 cw(c193.56,105.13) 195.583,105.13 ; P8.7@195.092,106.662 cw(c193.908,105.478) 195.583,105.478 ; P8.7@195.194,106.764 cw(c194.256,105.826) 195.583,105.826 ; P8.7@195.296,106.866 cw(c194.603,106.173) 195.583,106.173 ; P8.7@195.5,106.85 195.583,106.767 195.583,103.484 R24.2@196.763,102.304 ; 195.583,105.676 cw(c196.834,105.676) P8.7@195.949,106.561 ; 195.583,106.024 cw(c196.486,106.024) P8.7@195.848,106.662 ; R24.2@196.435,102.304 ccw(c195.643,102.304) 196.203,102.864 ccw(c196.763,103.424) R24.2@196.763,102.632 ; R24.2@196.579,102.304 ccw(c196.135,102.304) 196.449,102.618 ccw(c196.763,102.932) R24.2@196.763,102.488
TPO_N: P8.2 R23.2 U6.44 | length 36.1
  Top Layer w0.144: 193.92,122.036 ccw(c193.676,122.28) U6.44@194.021,122.28 ; U6.44@194.074,122.555 194.074,122.19 193.884,122 193.884,121.13 197.706,117.308 197.706,111.344 199.885,109.165 201.6,107.45 201.6,106.164 202.007,105.757 ; P8.2@201.578,105.133 ccw(c201.339,105.757) 202.007,105.757 ; P8.2@201.629,104.999 ccw(c201.419,105.547) 202.007,105.547 ; P8.2@201.681,104.864 ccw(c201.499,105.338) 202.007,105.338 ; P8.2@201.82,104.5 202.007,104.687 202.007,105.757 ; 202.007,105.338 ccw(c202.658,105.338) P8.2@202.198,104.878 ; 202.007,105.686 ccw(c203.006,105.686) P8.2@202.299,104.979
  Bottom Layer w0.144: P8.2@201.341,104.021 cw(c200.183,102.863) 201.82,102.863 cw(c203.457,102.863) P8.2@202.299,104.021 ; P8.2@201.442,104.122 cw(c200.531,103.211) 201.82,103.211 cw(c203.109,103.211) P8.2@202.198,104.122 ; P8.2@201.544,104.224 cw(c200.878,103.558) 201.82,103.558 cw(c202.762,103.558) P8.2@202.096,104.224 ; R23.2@201.714,102.536 ccw(c201.459,102.791) 201.82,102.791 ; 201.82,102.705 ccw(c202.347,102.705) R23.2@201.974,102.332 ; 201.82,103.053 ccw(c202.695,103.053) R23.2@202.076,102.434 ; 201.82,103.401 ccw(c203.043,103.401) R23.2@202.178,102.536 ; P8.2@201.82,104.5 201.82,102.38 R23.2@202,102.2
TPO_P: P8.1 R21.2 U6.45 | length 42.2
  Top Layer w0.144: 194.43,122.059 ccw(c194.209,122.28) U6.45@194.521,122.28 ; U6.45@194.574,122.555 194.574,122.204 194.228,121.857 194.228,121.272 194.592,120.908 198.05,117.45 198.05,111.486 201.944,107.592 201.944,106.306 202.15,106.1 ; P8.1@202.42,106.933 cw(c201.468,106.782) 202.15,106.1 ; P8.1@202.563,106.956 cw(c201.813,106.837) 202.35,106.3 cw(c202.887,105.763) P8.1@203.006,106.513 ; P8.1@202.705,106.979 cw(c202.157,106.891) 202.549,106.499 cw(c202.941,106.107) P8.1@203.029,106.655 ; P8.1@202.983,106.37 ccw(c202.832,105.418) 202.15,106.1 ; P8.1@203.09,107.04 202.15,106.1
  Bottom Layer w0.144: P8.1@202.611,106.561 cw(c200.597,104.547) 203.445,104.547 ; P8.1@202.712,106.662 cw(c200.944,104.894) 203.445,104.894 ; P8.1@202.814,106.764 cw(c201.292,105.242) 203.445,105.242 ; P8.1@202.916,106.866 cw(c201.64,105.59) 203.445,105.59 ; P8.1@203.018,106.968 cw(c201.987,105.937) 203.445,105.937 ; P8.1@203.05,107 203.445,106.605 R21.2@203.445,102.304 ; P8.1@203.12,107.07 cw(c202.335,106.285) 203.445,106.285 ; R21.2@203.213,102.536 ccw(c202.653,103.096) 203.445,103.096 ccw(c204.237,103.096) R21.2@203.677,102.536 ; R21.2@203.315,102.434 ccw(c203.001,102.748) 203.445,102.748 ccw(c203.889,102.748) R21.2@203.575,102.434 ; 203.445,106.26 cw(c203.87,106.26) P8.1@203.569,106.561
TV_OUT1: P13.3 P19.59 | length 61.6
  Top Layer w0.3: P19.59@139.2,140.1 144.65,140.1 ; 143.381,140.1 ccw(c143.381,142.018) v7@144.738,140.662 ; 144.105,140.1 ccw(c144.105,141.294) v7(144.95,140.45) ; v7@144.683,140.312 cw(c144.521,140.229) 144.65,140.1 ; v7@144.873,140.16 ccw(c144.813,139.937) 144.65,140.1 ; v7@144.95,140.4 144.65,140.1
  Bottom Layer w0.25: P13.3@128.84,177.388 133.612,177.388 136.8,174.2 136.8,169.65 136.95,169.5 136.95,169.414 146.25,160.114 146.25,141.85 v7@144.9,140.5 ; P13.3@129.14,177.087 cw(c129.866,176.362) 129.866,177.388 cw(c129.866,178.414) P13.3@129.14,177.688 ; P13.3@129.317,176.91 cw(c130.469,175.758) 130.469,177.388 cw(c130.469,179.017) P13.3@129.317,177.865 ; v7@144.95,140.775 ccw(c144.95,141.318) 145.334,140.934 ; v7@145.275,140.45 cw(c146.301,140.45) 145.575,141.175
TV_OUT2: P13.4 P19.57 | length 53.2
  Top Layer w0.25: P19.57@139.2,140.9 143.25,140.9 144.85,142.5 v7(147.7,142.5) ; P19.57@140.038,140.812 cw(c140.252,140.598) 140.252,140.9 cw(c140.252,141.202) P19.57@140.038,140.988 ; v7@147.47,142.27 ccw(c146.915,141.715) 146.915,142.5 ccw(c146.915,143.285) v7@147.47,142.73
  Bottom Layer w0.25: P13.4@136.54,177.388 137.4,176.527 ; P13.4@136.692,176.73 cw(c136.863,175.99) 137.4,176.527 ; P13.4@137.197,177.235 ccw(c137.937,177.064) 137.4,176.527 ; v7@147.47,142.73 ccw(c146.915,143.285) 147.7,143.285 ccw(c148.485,143.285) v7@147.93,142.73 ; v7(147.7,142.5) 147.7,159.3 137.4,169.6 137.4,176.527
TVDD: C54.1 C55.1 L7.2 R39.1 U7.23 U7.29 | length 21.7
  Top Layer w0.173: v10@118.428,171.778 cw(c117.883,171.233) U7.29@118.654,171.233 ; v10@118.6,172.05 v10(118.65,172) ; v10@118.6,172.05 118.678,171.972 118.654,171.949 U7.29@118.654,170.7 ; U7.29@118.654,171.253 cw(c119.396,171.253) v10@118.871,171.778 ; v10@121.428,171.828 cw(c120.883,171.283) U7.23@121.654,171.283 ; U7.23@121.654,170.7 v10@121.654,172.004 ; U7.23@121.654,171.303 cw(c122.396,171.303) v10@121.871,171.828
  Top Layer w0.5: v10@122.45,173.8 122.514,173.736 R39.1@123.444,173.736
  Bottom Layer w0.173: C54.1@118.396,171.164 ccw(c117.717,171.843) v10@118.678,171.843 ; v10@118.428,171.778 cw(c117.825,171.175) C54.1@118.678,171.175 ; v10@118.479,171.737 cw(c118.35,171.537) 118.579,171.476 cw(c118.935,171.381) v10@118.781,171.715 ; C54.1@118.519,171.041 ccw(c118.134,171.426) 118.678,171.426 ; v10@118.55,171.9 cw(c118.243,171.593) 118.678,171.593 ; C54.1@118.6,170.95 118.678,171.028 118.678,171.972 v10@118.601,172.05 ; C54.1@118.678,171.311 cw(c119.339,171.311) v10@118.871,171.778 ; 118.678,171.554 ccw(c119.23,171.554) C54.1@118.84,171.164 ; v10@121.428,171.828 cw(c120.854,171.254) C55.1@121.666,171.254 ; C55.1@121.444,171.164 ccw(c120.909,171.699) 121.666,171.699 ccw(c122.423,171.699) C55.1@121.888,171.164 ; v10@121.493,171.778 cw(c121.243,171.345) 121.726,171.474 ; v10@121.496,171.777 cw(c121.375,171.562) 121.612,171.499 ; 121.623,171.539 cw(c122.003,171.438) v10@121.807,171.778 ; C55.1@121.666,170.942 v10@121.666,172.033 ; C55.1@121.666,171.332 cw(c122.367,171.332) v10@121.871,171.828 ; 121.734,171.446 cw(c122.073,171.537) v10@121.849,171.808
  Bottom Layer w0.5: v10(118.65,172) 118.6,172.05 121.55,172.05 121.6,172 122.45,172.85 v10(122.45,173.75) v10@122.45,173.8 ; v10@118.756,171.894 cw(c119.133,171.517) 119.133,172.05
  other v10: 121.65,172.05
UART1_CTS: P20.17
UART1_RTS: P20.19
UART1_RX: P20.18
UART1_TX: P20.20
UART2_CTS: P20.31
UART2_RTS: P20.33
UART2_RX: P20.29
UART2_TX: P20.27
UART3_CTS: P20.48
UART3_RTS: P20.45 | length 6.8
  Top Layer w0.21: P20.45@181.6,145.7 182.9,145.7 184.6,147.4 v1@184.6,149 ; P20.45@182.453,145.597 cw(c182.7,145.35) 182.7,145.7 cw(c182.7,146.05) P20.45@182.453,145.803 ; v1@184.377,148.877 cw(c183.838,148.338) 184.6,148.338 ; 184.6,148.579 cw(c185.021,148.579) v1@184.723,148.877
  other v1: 184.55,149.05
UART3_RX: P20.46 U2.1 | length 42.8
  Top Layer w0.2: 175.967,145.65 ccw(c175.967,146.183) P20.46@176.344,145.806 ; P20.46@177.3,145.65 175.65,145.65 175.132,145.132 175.132,141.432 173.418,139.718 171.7,138 171.7,124.5 177.3,118.9 178.9,117.3 178.9,111.7 179.175,111.425 U2.1@180.45,111.425 ; U2.1@179.537,111.337 ccw(c179.323,111.123) 179.323,111.425 ccw(c179.323,111.727) U2.1@179.537,111.513
UART3_TX: P20.47 U2.5 | length 54.1
  Top Layer w0.2: v6@173.4,142 cw(c172.676,142) 173.188,141.488 cw(c173.7,140.976) v6@173.7,141.7 ; v6(173.7,142) 171.3,139.6 171.3,124.2 177.4,118.1 178.45,117.05 178.45,109.45 179.1,108.8 U2.5@180.4,108.8 ; 179.263,108.8 ccw(c179.263,109.187) U2.5@179.537,108.913 ; 179.384,108.8 cw(c179.384,108.584) U2.5@179.537,108.737 ; v6(179.5,144.8) 179.65,144.95 P20.47@181.45,144.95 ; v6@179.571,144.729 cw(c180.104,144.196) 180.104,144.95 ; v6@179.712,144.588 cw(c180.586,143.714) 180.586,144.95 ; 180.367,144.95 cw(c180.367,144.417) P20.47@180.744,144.794
  Bottom Layer w0.2: v6@173.6,142 175.3,143.7 176.339,143.7 177.389,144.75 v6@179.45,144.75 ; v6@173.7,142.3 ccw(c173.7,142.783) 174.041,142.441 ; v6@173.8,142 cw(c174.283,142) 173.941,142.341 ; v6@174,142 cw(c174.966,142) 174.283,142.683 ; 178.655,144.75 ccw(c178.655,145.645) v6@179.288,145.012 ; 178.896,144.75 cw(c178.896,144.196) v6@179.288,144.588 ; v6@179.5,144.75 v6@179.45,144.75 ; v6(179.5,144.8) v6@179.45,144.75
USB0_D_N: P4.2 P19.41 | length 38.5
  Top Layer w0.186: P19.41@139.2,147.3 140.35,147.3 140.564,147.514 144.11,147.514 144.436,147.84 147.744,151.148 147.744,176.793 147.951,177 ; P19.41@140.061,147.189 cw(c140.329,146.921) 140.329,147.3 cw(c140.329,147.679) P19.41@140.061,147.411 ; P4.2@147.833,177.264 cw(c147.595,176.999) 147.951,176.999 ; 147.951,177.034 cw(c148.285,177.034) P4.2@148.049,177.27 ; P4.2@147.951,178.263 147.951,177
USB0_D_P: P4.3 P19.39 | length 37.8
  Top Layer w0.186: P19.39@139.2,148.1 140.3,148.1 ; P19.39@140.067,147.996 cw(c140.3,147.789) 140.3,148.1 ; P19.39@140.067,148.204 ccw(c140.3,148.411) 140.3,148.1 ; P4.3@147.033,177.264 cw(c146.795,176.999) 147.151,176.999 ; 147.151,177.034 cw(c147.485,177.034) P4.3@147.249,177.27 ; P4.3@147.151,178.263 147.151,177 ; 140.3,148.1 140.5,147.9 143.95,147.9 144.05,148 147.358,151.308 147.358,176.793 147.151,177
USB0_DRVBUS: P19.43
USB0_ID: P4.4 P19.45 R100.1 | length 55
  Top Layer w0.186: P19.45@139.2,145.7 143.1,145.7 148.25,150.85 148.25,170.8 151.4,173.95 151.4,175.55 149.843,177.107 149.843,179.005 148.749,180.099 ; P19.45@140.061,145.589 cw(c140.329,145.321) 140.329,145.7 cw(c140.329,146.079) P19.45@140.061,145.811 ; R100.1@145.833,175.223 ccw(c144.614,176.442) 146.338,176.442 ; R100.1@145.964,175.092 ccw(c145.063,175.993) 146.338,175.993 ; R100.1@146.05,175 146.338,175.288 P4.4@146.338,178.281 146.35,178.293 146.35,179.7 146.75,180.1 148.748,180.1 ; R100.1@146.096,174.96 ccw(c145.512,175.544) 146.338,175.544 ; P4.4@146.227,177.27 cw(c145.959,177.002) 146.338,177.002 cw(c146.717,177.002) P4.4@146.449,177.27 ; P4.4@146.227,179.292 ccw(c145.93,179.589) 146.35,179.589 ; 146.35,179.531 ccw(c146.688,179.531) P4.4@146.449,179.292
USB0_VBUS: C16.1 P4.1 P19.37 | length 45.3
  Top Layer w0.5: P19.37@139.2,148.9 142.05,148.9 145.8,152.65 v8(145.8,171) ; v8@145.446,170.646 cw(c144.593,169.793) 145.8,169.793 cw(c147.007,169.793) v8@146.154,170.646 ; C16.1@148.611,175.112 ccw(c148.304,175.419) 148.738,175.419 ; C16.1@148.738,174.988 P4.1@148.738,178.281 ; C16.1@148.964,175 ccw(c148.964,176.036) v8@149.696,175.304 ; v8@149.681,174.612 ccw(c148.8,173.805) 148.8,175 v8@149.8,175
  Bottom Layer w0.5: v8(145.8,171) 145.8,171.185 149.615,175 v8@149.8,175 ; v8@145.8,171.5 ccw(c145.8,172.261) 146.338,171.723 ; v8@146.3,171 cw(c147.954,171) 146.784,172.169 ; 148.369,173.754 cw(c150.05,172.072) v8@150.05,174.45 ; 149.222,174.607 cw(c150.05,173.779) v8(150.05,174.95)
USB1__N: L2.2 P5.A2 | length 3
  Bottom Layer w0.173: P5.A2@116.7,102.141 116.809,102.141 117.45,101.5 117.45,100.45 ; L2.2@117.224,99.896 117.224,100.224 117.45,100.45 ; L2.2@117.337,100.153 cw(c117.723,100.177) 117.45,100.45
USB1__P: L2.3 P5.A3 | length 6.1
  Bottom Layer w0.173: 117.823,100.488 ccw(c118.366,100.488) L2.3@117.982,100.104 ; 117.823,100.905 ccw(c118.784,100.905) L2.3@118.104,100.226 ; L2.3@117.912,100.161 ccw(c117.601,100.205) 117.823,100.427 ; 117.988,101.638 cw(c118.276,101.349) P5.A3@118.469,101.709 ; L2.3@118.024,99.896 118.024,100.226 117.823,100.427 ; P5.A3@118.04,102.078 cw(c117.291,102.005) 117.823,101.473 ; P5.A3@118.387,101.556 ccw(c118.161,101.135) 117.823,101.473 ; P5.A3@118.7,102.141 118.491,102.141 117.823,101.473 ; 117.823,100.427 117.823,101.473
USB1_N: L2.1 U5.1 | length 35.5
  Top Layer w0.173: v9@116.487,96.913 ccw(c114.403,98.997) 117.35,98.997 ; v9@116.609,96.791 ccw(c114.821,98.579) 117.35,98.579 ; v9@116.732,96.668 ccw(c115.239,98.161) 117.35,98.161 ; v9@116.854,96.546 ccw(c115.656,97.744) 117.35,97.744 ; v9@116.924,96.25 117.35,96.676 117.35,99.373 115.291,101.432 115.291,106.918 122.5,114.127 122.5,114.459 U5.1@122.46,114.499 ; v9@116.976,96.424 ccw(c116.074,97.326) 117.35,97.326 ; v9@117.099,96.301 ccw(c116.491,96.909) 117.35,96.909 ; 122.226,113.854 ccw(c121.755,114.325) U5.1@122.422,114.325 ; U5.1@122.433,114.298 cw(c122.27,114.135) 122.5,114.135
  Bottom Layer w0.173: L2.1@117.144,97.865 cw(c116.461,97.182) 117.427,97.182 ; v9@117.15,96.65 117.427,96.927 117.427,97.673 ; L2.1@117.216,97.832 cw(c117.2,97.606) 117.427,97.606 ; L2.1@117.224,98.196 117.224,97.876 117.427,97.673 ; L2.1@117.266,97.988 cw(c116.878,97.6) 117.427,97.6 ; L2.1@117.337,97.932 ccw(c117.65,97.896) 117.427,97.673
  other v9: 116.85,96.55
USB1_P: L2.4 U5.2 | length 26.1
  Top Layer w0.173: v9@117.838,96.535 ccw(c117.444,96.561) 117.723,96.84 ; v9@118.35,96.25 118,96.25 118.313,96.25 117.723,96.841 ; U5.2@122.96,114.499 122.96,114.06 115.664,106.764 115.664,101.586 117.723,99.527 117.723,96.841
  Bottom Layer w0.173: L2.4@117.911,97.939 cw(c117.531,97.919) 117.8,97.65 ; L2.4@118.024,98.196 118.024,97.874 117.8,97.65 ; v9@118.15,96.589 118.15,96.6 117.8,96.95 117.8,97.65 ; v9@118.178,96.25 118,96.25 v9@118.35,96.25
  other v9: 118.35,96.5
USB2__N: L3.2 P5.B2 | length 9.6
  Top Layer w0.173: P5.B2@116.7,104.761 117.514,105.575 ; P5.B2@116.827,105.235 ccw(c116.954,105.711) 117.302,105.363 ccw(c117.65,105.015) P5.B2@117.174,104.888 ; P5.B2@116.872,105.402 ccw(c117.043,106.046) 117.514,105.575 ; P5.B2@117.341,104.933 cw(c117.985,105.104) 117.514,105.575 ; 119.212,109.562 cw(c119.637,109.137) L3.2@119.637,109.738 ; L3.2@119.887,109.852 119.55,109.852 119.55,109.9 119.097,109.447 117.514,107.864 117.514,105.575
USB2__P: L3.3 P5.B3 | length 8.7
  Top Layer w0.173: P5.B3@118.059,104.933 ccw(c117.416,105.104) 117.887,105.575 ; P5.B3@118.227,104.888 ccw(c117.751,105.015) 118.099,105.363 ccw(c118.447,105.711) P5.B3@118.574,105.235 ; P5.B3@118.529,105.402 cw(c118.358,106.046) 117.887,105.575 ; P5.B3@118.7,104.761 117.887,105.575 ; L3.3@119.557,108.972 ccw(c119.363,108.778) 119.363,109.052 ccw(c119.363,109.326) L3.3@119.557,109.132 ; L3.3@119.887,109.052 119.252,109.052 117.887,107.687 117.887,105.575
USB2_N: L3.1 U5.3 | length 6.5
  Top Layer w0.173: L3.1@121.587,109.852 121.689,109.75 122.4,109.75 123.127,110.477 123.127,113.177 123.46,113.51 U5.3@123.46,114.499 ; L3.1@121.917,109.932 ccw(c122.357,110.372) 122.357,109.75
USB2_P: L3.4 U5.4 | length 7.2
  Top Layer w0.173: L3.4@121.587,109.052 121.852,109.052 122.15,109.35 122.527,109.35 123.5,110.322 123.5,113.022 123.96,113.483 U5.4@123.96,114.499 ; L3.4@121.837,109.165 ccw(c121.837,109.475) 122.056,109.256 ; L3.4@121.951,109.052 cw(c122.189,109.052) L3.4@122.021,109.221
USB3__N: L4.2 P6.A2 | length 5.2
  Bottom Layer w0.173: P6.A2@138.929,102.179 139.7,101.407 ; P6.A2@139.077,101.711 cw(c139.203,101.313) 139.499,101.609 cw(c139.794,101.904) P6.A2@139.396,102.03 ; P6.A2@139.129,101.546 cw(c139.3,101.008) 139.7,101.407 ; L4.2@139.503,99.859 139.503,100.253 139.7,100.45 ; P6.A2@139.561,101.978 ccw(c140.1,101.807) 139.7,101.407 ; L4.2@139.613,100.137 cw(c139.933,100.217) 139.7,100.45 ; 139.7,100.45 139.7,101.407
USB3__P: L4.3 P6.A3 | length 5.8
  Bottom Layer w0.173: L4.3@140.19,100.119 ccw(c139.786,100.155) 140.073,100.442 ; P6.A3@140.281,102.035 cw(c139.528,101.869) 140.073,101.323 ; L4.3@140.303,99.859 140.3,99.862 140.3,100.215 140.073,100.442 ; P6.A3@140.45,102.073 cw(c139.893,101.95) 140.296,101.546 cw(c140.699,101.143) P6.A3@140.823,101.7 ; P6.A3@140.785,101.531 ccw(c140.619,100.778) 140.073,101.323 ; P6.A3@140.929,102.179 140.073,101.323 ; 140.073,100.442 140.073,101.323